# Altium PCB X1.PcbDoc
Units mil, origin at the board's own origin, x right, y up, seen from the top; angles counter-clockwise.
Board outline 2125.98 x 3543.31 mil, 2 copper layers (Top Layer, Bottom Layer); 61 components, 80 nets, 253 pads, 104 vias.
Unrouted connection lines stored in the file: 24.
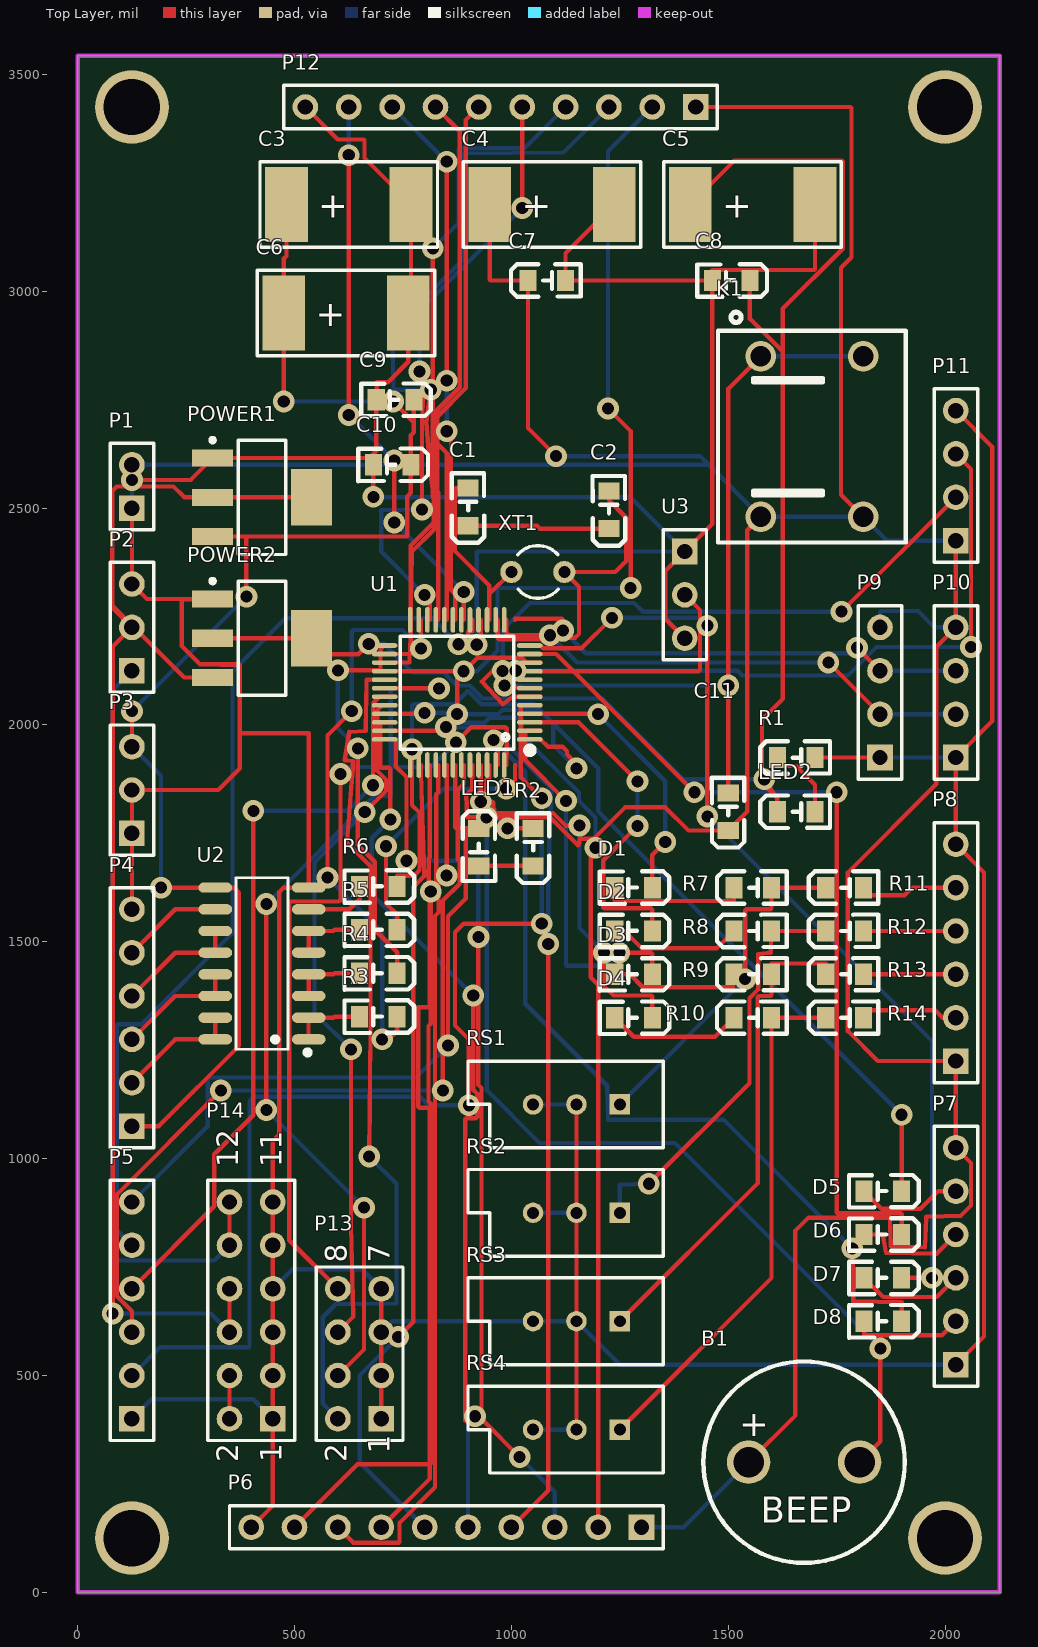
[diagram p0: Top Layer view]
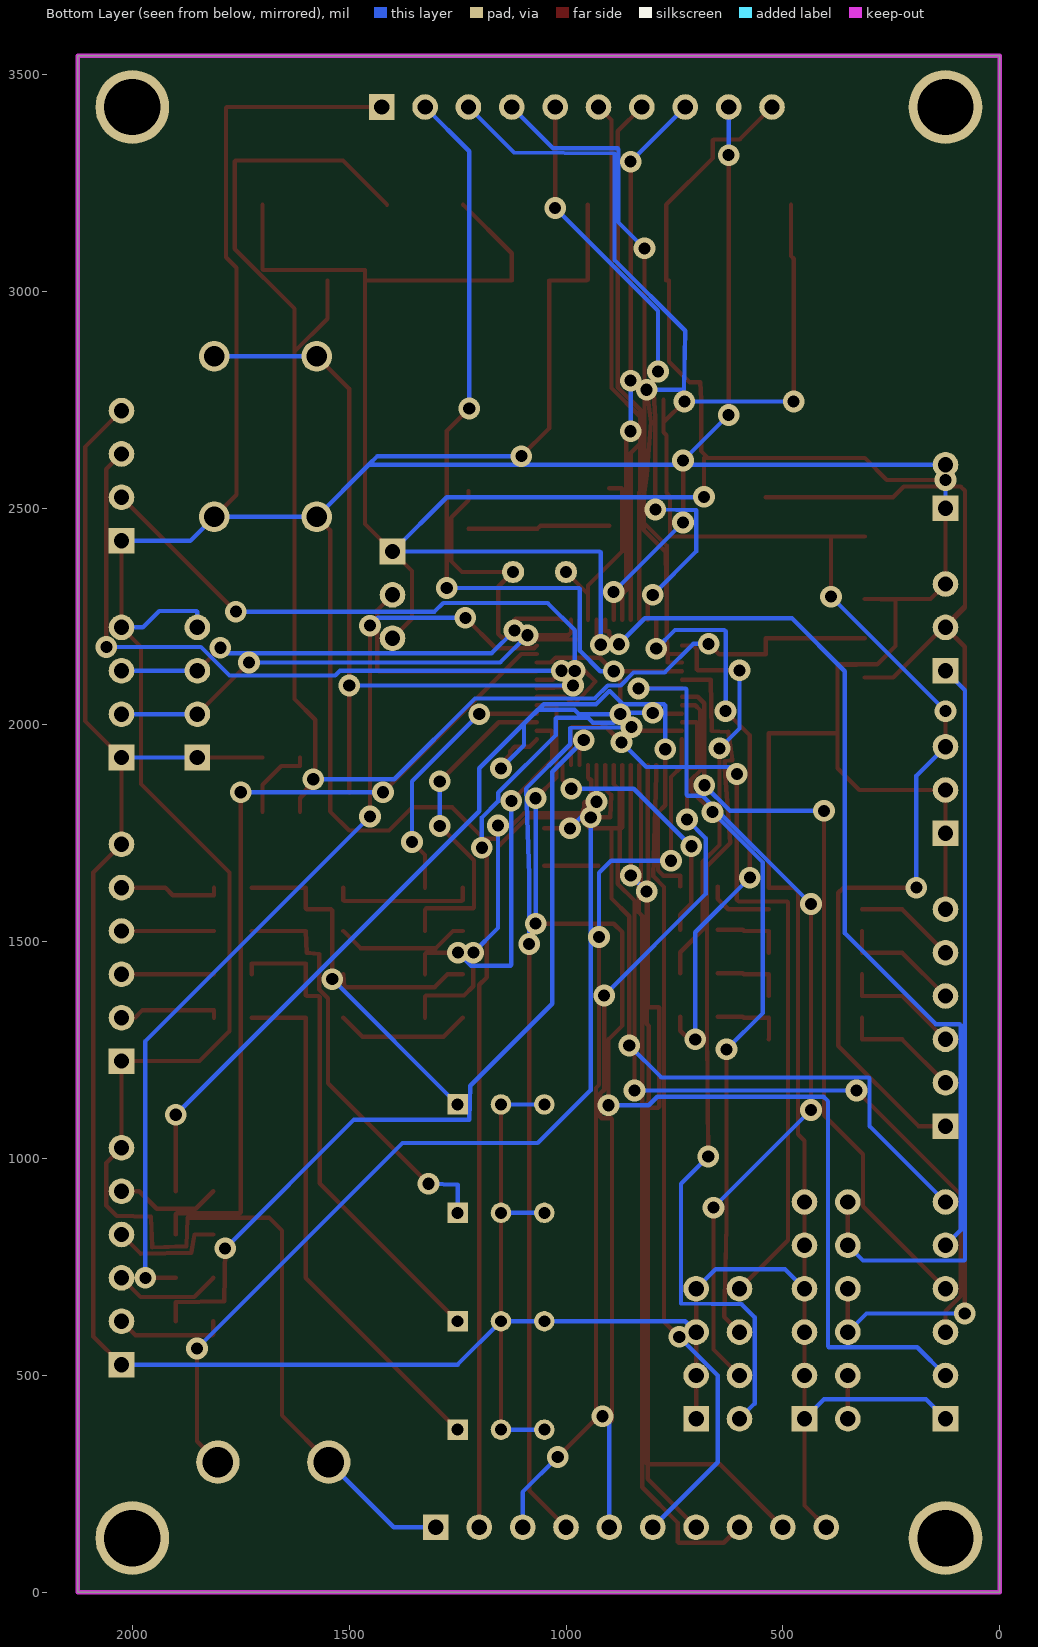
[diagram p1: Bottom Layer view, seen from below]

## Layer stack, top to bottom
Top Solder: solder mask 0.4, Solder Resist, Dk 3.5
Top Layer: signal copper 1.4
Dielectric 1: dielectric 12.6, FR-4, Dk 4.8
Bottom Layer: signal copper 1.4
Bottom Solder: solder mask 0.4, Solder Resist, Dk 3.5

## Board outline
0,0 0,3543.31 2125.98,3543.31 2125.98,0

## Design rules (kind name [scope] priority, off if disabled: settings)
Clearance [InNet('No Net') vs InNet('No Net')] p1: gap=10 ignorepadtopadclearanceinfootprint=TRUE except(0: Arc-Hole Track-Hole SMDPad-Hole THPad-Hole Via-Hole Fill-Hole Poly-Hole Region-Hole Text-Hole; 5: SMDPad-SMDPad THPad-THPad)
PolygonConnect [All] p1: connectstyle=Relief reliefconductorwidth=10 reliefentries=4 polygonreliefangle="90 Angle" airgapwidth=10
RoutingVias [All] p1: holewidth=28 width=50 viastyle="Through Hole" minholewidth=28 minwidth=50 maxholewidth=28 maxwidth=50
SolderMaskExpansion [All] p1: expansion=4 istentingtop=FALSE
Width [All] p1: maxlimit=10 minlimit=1 preferedwidth=10
30 further rules are at their usual default settings.

## Components (designator, comment, footprint, x,y, rotation, side; value= is the part's Value field where it differs from the comment)
B1 "BUZZER" BEEP1 1675,300 r0 top
C1 "Cap" 0805 900,2502.76 r90 top value=30pF
C2 "Cap" 0805 1225,2496.07 r90 top value=30pF
C3 "104" C107V 625,3200 r0 top value=220uf
C4 "104" C107V 1093.7,3200 r0 top value=220uf
C5 "104" C107V 1556.3,3200 r0 top value=220uf
C6 "104" C107V 618.7,2950 r0 top value=220uf
C7 "104" 0805 1081.7,3025 r0 top value=100pF
C8 "104" 0805 1506.69,3025 r180 top value=100pF
C9 "104" 0805 731.69,2750 r180 top value=100pF
C10 "104" 0805 725,2600 r180 top value=100pF
C11 "104" 0805 1500,1800 r90 top value=100pF
D1 "Diode 1N4148" 0805 1281.69,1625 r180 top
D2 "Diode 1N4148" 0805 1281.69,1525 r180 top
D3 "Diode 1N4148" 0805 1281.69,1425 r180 top
D4 "Diode 1N4148" 0805 1281.69,1325 r180 top
D5 "Diode 1N4148" 0805 1856.69,925 r180 top
D6 "Diode 1N4148" 0805 1856.69,825 r180 top
D7 "Diode 1N4148" 0805 1856.69,725 r180 top
D8 "Diode 1N4148" 0805 1856.69,625 r180 top
K1 "KEY_2PIN" KEY-4Pin 1693.11,2664.97 r90 top
LED1 "LED-R(UC)" 0805 925,1718.3 r270 top
LED2 "LED-G(POWER)" 0805 1656.69,1800 r0 top
P1 "MCU 5V IN" HDR1X2 125,2500 r90 top
P2 "5V DCOUT" HDR1X3 125,2125 r90 top
P3 "12V DCIN" HDR1X3 125,1750 r90 top
P4 "2003" HDR1X6 125,1075 r90 top
P5 "GPIO" HDR1X6 125,400 r90 top
P6 "KEY PORT" HDR1X10 1300,150 r180 top
P7 "INT/CCP" HDR1X6 2025,525 r90 top
P8 "ADC" HDR1X6 2025,1225 r90 top
P9 "I2C" HDR1X4 1850,1925 r90 top
P10 "I2C" HDR1X4 2025,1925 r90 top
P11 "UART" HDR1X4 2025,2425 r90 top
P12 "LCD PORT" HDR1X10 1425,3425 r180 top
P13 "SET/GPIO" HDR2X4 700,400 r90 top
P14 "POWER OUT" HDR2X6 450,400 r90 top
POWER1 "LM7805" SOT223_N 425,2525 r0 top
POWER2 "LM1117-3.3" SOT223_N 425,2200 r0 top
R1 "Res2" 0805 1656.69,1925 r0 top value=1K
R2 "Res2" 0805 1050,1718.31 r90 top value=1K
R3 "Res2" 0805 693.31,1327.56 r180 top value=1K
R4 "Res2" 0805 693.31,1427.56 r180 top value=1K
R5 "Res2" 0805 693.31,1527.56 r180 top value=1K
R6 "Res2" 0805 693.31,1627.56 r180 top value=1K
R7 "Res2" 0805 1556.7,1625 r0 top value=10K
R8 "Res2" 0805 1556.7,1525 r0 top value=10K
R9 "Res2" 0805 1556.7,1425 r0 top value=10K
R10 "Res2" 0805 1556.7,1325 r0 top value=10K
R11 "Res2" 0805 1768.31,1625 r0 top value=10K
R12 "Res2" 0805 1768.31,1525 r0 top value=10K
R13 "Res2" 0805 1768.31,1425 r0 top value=10K
R14 "Res2" 0805 1768.31,1325 r0 top value=10K
RS1 "RPot" VR5 1150,1125 r180 top value=10K
RS2 "RPot" VR5 1150,875 r180 top value=10K
RS3 "RPot" VR5 1150,625 r180 top value=10K
RS4 "RPot" VR5 1150,375 r180 top value=10K
U1 "STC12C5A60S2-LQFP48" LQFP-48_7x7x05P 875,2075 r90 top
U2 "ULN2803" SOP-16 425,1450 r90 top
U3 "TOP0038" HDR1X3 1400,2400 r270 top
XT1 "12M" R38 1061.02,2352.76 r90 top

## Footprints (in the part's own frame and the unit in brackets; to place one, negate y for a bottom-side part, rotate by r counter-clockwise, add the part's x,y. Pads: shape width x height; smd on the part's side, far side on the other; paste and mask are expansions set on the pad)
0805 [mm]
  rect 1x1.25 smd: 1(-1.1,0) 2(1.1,0)
  silkscreen extent -2.1,-0.95 1.98,0.96
BEEP1 [mil]
  round 100 hole 70: 1(-127.95,0) 2(127.95,0)
  silkscreen extent -232,-232 232,232
C107V [mm]
  rect 2.5x4.4 smd: 1(-3.65,0) 2(3.65,0)
  silkscreen extent -5.2,-2.5 5.2,2.5
HDR1X2 [mm] "Connector; Header; 2 Position"
  rect 1.5x1.5 hole 0.9: 1(0,0)
  round 1.5 hole 0.9: 2(2.54,0)
  silkscreen extent -1.27,-1.27 3.81,1.27
HDR1X3 [mm] "Connector; Header; 3 Position"
  rect 1.5x1.5 hole 0.9: 1(0,0)
  round 1.5 hole 0.9: 2(2.54,0) 3(5.08,0)
  silkscreen extent -1.27,-1.27 6.35,1.27
HDR1X4 [mm] "Connector; Header; 4 Position"
  rect 1.5x1.5 hole 0.9: 1(0,0)
  round 1.5 hole 0.9: 2(2.54,0) 3(5.08,0) 4(7.62,0)
  silkscreen extent -1.27,-1.27 8.89,1.27
HDR1X6 [mm] "Connector; Header; 6 Position"
  rect 1.5x1.5 hole 0.9: 1(0,0)
  round 1.5 hole 0.9: 2(2.54,0) 3(5.08,0) 4(7.62,0) 5(10.16,0) 6(12.7,0)
  silkscreen extent -1.27,-1.27 13.97,1.27
HDR1X10 [mm] "Connector; Header; 10 Position"
  rect 1.5x1.5 hole 0.9: 1(0,0)
  round 1.5 hole 0.9: 2(2.54,0) 3(5.08,0) 4(7.62,0) 5(10.16,0) 6(12.7,0) 7(15.24,0) 8(17.78,0) 9(20.32,0) 10(22.86,0)
  silkscreen extent -1.27,-1.27 24.13,1.27
HDR2X4 [mm] "Connector; Header; 4x2 Position"
  rect 1.5x1.5 hole 0.9: 1(0,0)
  round 1.5 hole 0.9: 2(0,2.54) 3(2.54,0) 4(2.54,2.54) 5(5.08,0) 6(5.08,2.54) 7(7.62,0) 8(7.62,2.54)
  silkscreen extent -1.27,-1.27 8.89,3.81
HDR2X6 [mm] "Connector; Header; 6x2 Position"
  rect 1.5x1.5 hole 0.9: 1(0,0)
  round 1.5 hole 0.9: 2(0,2.54) 3(2.54,0) 4(2.54,2.54) 5(5.08,0) 6(5.08,2.54) 7(7.62,0) 8(7.62,2.54) 9(10.16,0) 10(10.16,2.54) 11(12.7,0) 12(12.7,2.54)
  silkscreen extent -1.27,-1.27 13.97,3.81
KEY-4Pin [mm]
  round 1.8 hole 1.2: 1(-4.7,-3) 1(-4.7,3) 2(4.7,-3) 2(4.7,3)
  silkscreen extent -6.2,-5.5 7.28,5.5
LQFP-48_7x7x05P [mm]
  oval 0.27x1.5 smd: 1(-2.75,-4.25) 2(-2.25,-4.25) 3(-1.75,-4.25) 4(-1.25,-4.25) 5(-0.75,-4.25) 6(-0.25,-4.25) 7(0.25,-4.25) 8(0.75,-4.25) 9(1.25,-4.25) 10(1.75,-4.25) 11(2.25,-4.25) 12(2.75,-4.25) 25(2.75,4.25) 26(2.25,4.25) 27(1.75,4.25) 28(1.25,4.25) 29(0.75,4.25) 30(0.25,4.25) 31(-0.25,4.25) 32(-0.75,4.25) 33(-1.25,4.25) 34(-1.75,4.25) 35(-2.25,4.25) 36(-2.75,4.25)
  oval 1.5x0.27 smd: 13(4.25,-2.75) 14(4.25,-2.25) 15(4.25,-1.75) 16(4.25,-1.25) 17(4.25,-0.75) 18(4.25,-0.25) 19(4.25,0.25) 20(4.25,0.75) 21(4.25,1.25) 22(4.25,1.75) 23(4.25,2.25) 24(4.25,2.75) 37(-4.25,2.75) 38(-4.25,2.25) 39(-4.25,1.75) 40(-4.25,1.25) 41(-4.25,0.75) 42(-4.25,0.25) 43(-4.25,-0.25) 44(-4.25,-0.75) 45(-4.25,-1.25) 46(-4.25,-1.75) 47(-4.25,-2.25) 48(-4.25,-2.75)
  silkscreen extent -3.59,-4.46 3.3,3.34
R38 [mm] "Crystal, Thru-Hole; 2 Leads; Body 3.1 x 8.2 mm (Dia.xH)"
  round 1.3 hole 0.7: 1(0,1.55) 2(0,-1.55)
  silkscreen extent -1.55,-1.19 1.55,1.17
SOP-16 [mil]
  oval 23.7x77.6 smd: 1(-175,-107.7) 2(-125,-107.7) 3(-75,-107.7) 4(-25,-107.7) 5(25,-107.7) 6(75,-107.7) 7(125,-107.7) 8(175,-107.7) 9(175,107.7) 10(125,107.7) 11(75,107.7) 12(25,107.7) 13(-25,107.7) 14(-75,107.7) 15(-125,107.7) 16(-175,107.7)
  silkscreen extent -211,-111 198,60
SOT223_N [mm] "SOT223, 4-Leads, Body 6.5x3.5mm, Pitch 2.3mm, Lead Span 7mm, IPC Medium Density"
  rect 2.4x1 smd: 1(-2.9,2.3) 2(-2.9,0) 3(-2.9,-2.3)
  rect 2.4x3.3 smd: 4(2.9,0)
  silkscreen extent -3.02,-3.35 1.4,3.47, body extent -1.85,-3.35 1.85,3.35, height 1.7
VR5 [mm] "Thru-Hole; 3 Leads"
  rect 1.2x1.2 hole 0.7: 1(-2.54,0)
  round 1.2 hole 0.7: 2(0,0) 3(2.54,0)
  silkscreen extent -5.08,-2.54 6.35,2.54

## Part data
C1 C2: "Capacitor", LatestRevisionDate=17-Jul-2002, LatestRevisionNote="Re-released for DXP Platform.", PackageDescription="Radial Cap, Thru-Hole; 2 Leads; 0.3 in Pin Spacing", PackageReference=RAD-0.3, Published=8-Jun-2000, Publisher="Altium Limited"
C3 C4 C5 C6: library part Cap2, "Capacitor", PackageDescription="Capacitor; 2 Leads", PackageReference=CAPR5-4X5, Published=23-Sep-2002, Publisher="Altium Limited"
C7 C8 C9 C10 C11: library part Cap, "Capacitor", LatestRevisionDate=17-Jul-2002, LatestRevisionNote="Re-released for DXP Platform.", PackageDescription="Radial Cap, Thru-Hole; 2 Leads; 0.3 in Pin Spacing", PackageReference=RAD-0.3, Published=8-Jun-2000, Publisher="Altium Limited"
D1 D2 D3 D4 D5 D6 D7 D8: "High Conductance Fast Diode", Code_JEDEC=DO-204-AH, ComponentLink1Description="Manufacturer Link", ComponentLink1URL=http://www.fairchildsemi.com/, ComponentLink2Description=Datasheet, ComponentLink2URL=http://www.fairchildsemi.com/ds/1N%2F1N4148.pdf, DatasheetVersion=1997, LatestRevisionDate=17-Jul-2002, LatestRevisionNote="Re-released for DXP Platform.", PackageDescription="Diode, Axial; Body 3.8 x 1.9 mm (LxDia. max), Lead Dia. 0.53 mm (max)", PackageReference=DO-35, Published=8-Jun-2000, Publisher="Altium Limited"
LED1 LED2: library part LED2, "Typical RED, GREEN, YELLOW, AMBER GaAs LED", LatestRevisionDate=17-Jul-2002, LatestRevisionNote="Re-released for DXP Platform.", PackageDescription="SM LED; 2 Flat Leads", PackageReference=3.2X1.6X1.1, PackageVersion=Feb-2002, Published=8-Jun-2000, Publisher="Altium Limited"
P1: library part "Header 2", "Header, 2-Pin", LatestRevisionDate=17-Jul-2002, LatestRevisionNote="Re-released for DXP Platform.", Publisher="Altium Limited"
P2 P3 U3: library part "Header 3", "Header, 3-Pin", LatestRevisionDate=17-Jul-2002, LatestRevisionNote="Re-released for DXP Platform.", Publisher="Altium Limited"
P4 P5 P7 P8: library part "Header 6", "Header, 6-Pin", LatestRevisionDate=17-Jul-2002, LatestRevisionNote="Re-released for DXP Platform.", Publisher="Altium Limited"
P6 P12: library part "Header 10", "Header, 10-Pin", LatestRevisionDate=17-Jul-2002, LatestRevisionNote="Re-released for DXP Platform.", Publisher="Altium Limited"
P9 P10 P11: library part "Header 4", "Header, 4-Pin", LatestRevisionDate=17-Jul-2002, LatestRevisionNote="Re-released for DXP Platform.", Publisher="Altium Limited"
P13: library part "Header 4X2", "Header, 4-Pin, Dual row", LatestRevisionDate=17-Jul-2002, LatestRevisionNote="Re-released for DXP Platform.", Publisher="Altium Limited"
P14: library part "Header 6X2", "Header, 6-Pin, Dual row", LatestRevisionDate=17-Jul-2002, LatestRevisionNote="Re-released for DXP Platform.", Publisher="Altium Limited"
POWER2: library part LM7805
R1 R2 R3 R4 R5 R6 R7 R8 R9 R10 R11 R12 R13 R14: "Resistor", LatestRevisionDate=17-Jul-2002, LatestRevisionNote="Re-released for DXP Platform.", PackageDescription="Axial Device, Thru-Hole; 2 Leads; 0.4 in Pin Spacing", PackageReference=AXIAL-0.4, Published=8-Jun-2000, Publisher="Altium Limited"
RS1 RS2 RS3 RS4: "Potentiometer", LatestRevisionDate=17-Jul-2002, LatestRevisionNote="Re-released for DXP Platform.", PackageDescription="Variable Resistor, Thru-Hole; 3 Leads", PackageReference=VR5, Published=8-Jun-2000, Publisher="Altium Limited", Set Position=0.5, Sim Note="Enter the Resistance value and the set point into parameter fields."
U2: library part ULN2003
XT1: library part XTAL, "Crystal Oscillator", LatestRevisionDate=17-Jul-2002, LatestRevisionNote="Re-released for DXP Platform.", PackageDescription="Crystal, Thru-Hole; 2 Leads; Body 3.1 x 8.2 mm (Dia.xH)", PackageReference=R38, Published=8-Jun-2000, Publisher="Altium Limited"

## Free pads (board coordinates)
  round 170 hole 130: 0(125,125) 0(125,3425) 0(2000,125) 0(2000,3425)

## Via types
v1: diameter 50, hole 28, Top Layer to Bottom Layer, 104 vias

## Nets (pads, with @x,y where several pads share a name; then routed paths per layer and width w, separated by ;. In a path a pad name is that pad's centre, name@x,y a point inside that pad or via, vN(x,y) a via of type N, cw(c..) or ccw(c..) an arc to the next point about the centre after c; other vN are vias at no path point)
00: P6.9 U1.40 | length 2005
  Top Layer w10: P6.9 645,295 812,295 814,297 814,1127 809,1132 809,1306 814,1311 v1(814,1616) ; v1(850.79,1652.79) 850.79,1907.68
  Bottom Layer w10: v1(814,1616) v1(850.79,1652.79)
01: P6.8 U1.39 | length 1991.1
  Top Layer w10: P6.8 636,114 740,114 742,116 742,160 824,242 824,1559.64 832,1567.64 832,1636 830,1638 829,1638 827,1640 827,1840.21 831.1,1844.31 831.1,1907.68
02: P6.7 U1.38 | length 1852.1
  Top Layer w10: P6.7 811.42,261.42 811.42,1114 808.42,1117 788,1117 785,1120 785,1347.97 786,1348.97 808.39,1348.97 811.42,1352 811.42,1612.79 809.79,1614.42 809.79,1692.79 811.42,1694.42 811.42,1907.68
03: P6.6 U1.37 | length 1881.6
  Top Layer w10: v1(739,589) 774,624 774,1626.55 799,1651.55 791.73,1887.27 791.73,1907.68
  Bottom Layer w10: v1(739,589) 650,500 650,300 P6.6
3.3V: C5.1 C8.1 LED2.1 POWER2.2 POWER2.4 | length 3683.4
  Top Layer w10: POWER2.2 POWER2.4 539.17,2163 647,2163 v1(671,2187) ; C5.1 1514.21,3301.62 1762,3301.62 1764.21,3299.4 1764.21,3098.38 1626,2960.17 1626,2861 ; C8.1 1550,2937 1626,2861 ; v1(1583,1875) 1613.39,1830.61 ; LED2.1 1613.39,1830.61 ; 1613.39,1830.61 1578,1866 1578,1875 1578,2012 1626,2060 1626,2861
  Bottom Layer w10: v1(671,2187) 706.62,2187 772.62,2121 844.18,2121 874,2091.18 903.82,2091.18 934,2061 1210,2061 1396,1875 v1(1583,1875)
04: P6.5 U1.36 | length 2000.9
  Top Layer w10: U1.36@732.68,1966.73 733,1966.73 733,1905 758,1880 v1(758,1687) ; v1(916,406) 931,421 931,1163 924,1170 v1(924,1511)
  Bottom Layer w10: v1(758,1687) 896,1687 924,1659 v1(924,1511) ; P6.5 900,404 902,406 v1(916,406)
05: P6.4 U1.35 | length 2181.5
  Top Layer w10: U1.35@732.68,1986.42 840.42,1986.42 v1(849,1995) ; P6.4 1085,235 v1(1085,1495)
  Bottom Layer w10: v1(849,1995) 990,1993 990,1955.32 1092,1853.32 1085,1652.18 v1(1085,1495)
5V: B1.1 C4.1 C7.1 C11.1 K1.1 LED1.1 P1.2 P5.6 P6.1 P7.6 P8.1 P9.4 P10.4 P11.1 P12.1 U1.41 | length 10986.4
  Top Layer w10: v1(854,1261) 854,1559 895,1600 895,1758.61 898,1761.61 ; 870.47,1907.68 870.47,1764 872.85,1761.61 898,1761.61 ; C4.1 950,3027 952,3025 C7.1 1038.39,2684.61 v1(1103,2620) ; P12.1 1782,3425 1784.21,3422.79 1784.21,3078.38 1760,3054.17 1760,2531.15 K1.1@1811.23,2479.92 ; B1.1 1655,407.95 1655,834 1685,864 1873,864 1875,798 1954,795 1957,866 2036,868 2060,892 2060,990 P7.6 P8.1 1845,1225 1776,1294 1776,1660 1980,1864 1980,2180 P10.4 P11.1 ; K1.1@1575,2479.92 1544,2448.92 1544,1800.69 C11.1 1408.31,1756.69 1355,1810 1262.27,1810 1190.27,1738 1159,1738 1157,1736 1157,1726 1154,1723 1153,1723 1089,1787 970.39,1787 945,1761.61 LED1.1 898,1761.61
  Bottom Layer w10: P5.6 300,1075 300,1185 302,1187 780,1187 v1(854,1261) ; P1.2 1454.92,2600 ; v1(1103,2620) 1434.92,2620 1454.92,2600 ; P6.1 1397.05,150 B1.1 ; P9.4 1850,2261 1852,2263 1938,2263 1976,2225 P10.4 ; P11.1 1866.15,2425 1811.23,2479.92 1575,2479.92 1454.92,2600
5VOUT: P2.2 P14.6 P14.8 POWER1.2 POWER1.4 POWER2.3 | length 3094.5
  Top Layer w10: v1(80.47,643) 80.47,2180.47 P2.2 80,2270 80,2275 ; POWER2.3 245.55,2109.45 80,2275 ; P14.6 P14.8 ; POWER1.4 POWER1.2 246,2525 221,2550 90,2550 80,2540 80,2275
  Bottom Layer w10: v1(80.47,643) 307,643 P14.6
06: P6.3 U1.34 | length 2161.4
  Top Layer w10: v1(721,1781.93) 721,1898 718,1901 700,1901 698,1903 698,2004.1 700,2006.1 U1.34@732.68,2006.1 ; v1(912,1376.14) 912,1159 921,1150 921,1096 918,1093 896,1093 894,1091 894,396.21 896,394.21 936.79,394.21 v1(1019,312)
  Bottom Layer w10: v1(721,1781.93) 678,1738.93 678,1610.14 v1(912,1376.14) ; v1(1019,312) 1100,231 P6.3
07: P6.2 U1.33 | length 2254.6
  Top Layer w10: U1.33@732.68,2025.79 797.79,2025.79 v1(800,2028) ; v1(1194,1717) 1183,1706 1183,1418 1200,1401 P6.2
  Bottom Layer w10: v1(800,2028) 867,2028 890,2005 938,2005 950,2017 1022,2017 1024,2015 1024,1976 1156,1844 1156,1824.46 1194,1786.46 v1(1194,1717)
10: B1.2 U1.43 | length 2237.2
  Top Layer w10: 909.84,1907.68 909.84,1852.6 896,1838.76 898,1787 v1(943,1787) ; B1.2 1851,348.05 v1(1851,562)
  Bottom Layer w10: v1(943,1787) 943,1158 1065,1036 1377,1036 v1(1851,562)
11: R2.2 U1.44 | length 230.6
  Top Layer w10: v1(929.53,1823) 929.53,1907.68 ; v1(990.91,1761.61) R2.2
  Bottom Layer w10: v1(929.53,1823) v1(990.91,1761.61)
12: D4.1 U1.45 | length 899.1
  Top Layer w10: 949.21,1907.68 949.21,1878 946.21,1875 944,1875 942,1873 942,1827 944,1825 948,1825 950,1823 956,1823 958,1821 958,1807 960,1805 960.44,1805 960.94,1804.5 960.94,1800 963.94,1797 1096,1797 1125,1768 v1(1157,1768) ; v1(1213.7,1475) 1213.7,1397.69 1235.39,1376 1323,1376 1325,1374 D4.1
  Bottom Layer w10: v1(1157,1768) 1157,1531.7 v1(1213.7,1475)
12VIN: C3.1 C6.1 C9.1 C10.1 P3.3 P4.1 POWER1.3 U2.9 | length 3355.4
  Top Layer w10: P4.1 187,1075 372,1260 372,1613 360,1625 U2.9 v1(192,1625) ; P3.3 v1(125,2032) ; POWER1.3 386.55,2434.45 ; v1(389,2296) 389,2432 386.55,2434.45 ; v1(475,2746) C6.1 475,3075 481.3,3081.3 C3.1 ; v1(727,2746) 775,2698 ; C9.1 775,2698 ; 386.55,2434.45 758,2434.45 760,2436.45 760,2527 768.31,2535.31 C10.1 768.31,2668.31 775,2675 775,2698
  Bottom Layer w10: P3.3 192,1883 v1(192,1625) ; v1(125,2032) v1(389,2296) ; v1(475,2746) v1(727,2746)
12VOUT: P2.1 P14.10 P14.12 | length 1762
  Top Layer w10: P14.10 P14.12
  Bottom Layer w10: P2.1 80,2080 80,767 82,765 315,765 P14.10
13: D8.1 U1.46 | length 2009
  Top Layer w10: v1(959,1965) 968.9,1955.1 968.9,1907.68 ; v1(1786,793) 1788,671 1900,669 D8.1
  Bottom Layer w10: v1(959,1965) 1031.83,1892.17 1031.83,1357.17 1221,1168 1223,1090 1489,1090 v1(1786,793)
14: P13.8 U1.47 | length 1861.4
  Top Layer w10: P13.8 488,812 488,1591 490,1593 602,1593 606,1597 v1(606,1887) ; v1(872,1960) 907,1995 986,1995 989,1992 989,1932.42 988.58,1932 988.58,1907.68
  Bottom Layer w10: v1(606,1887) 622,1903 815,1903 v1(872,1960)
15: D3.1 U1.2 | length 873
  Top Layer w10: U1.2@1067.32,1986.42 1034,1986.42 1032,1984.42 1032,1919 v1(1126,1825) ; v1(1249,1475) 1322,1475 1325,1472 D3.1
  Bottom Layer w10: v1(1126,1825) 1126,1447 1128,1445 1219,1445 v1(1249,1475)
16: D2.1 U1.3 | length 767.8
  Top Layer w10: U1.3@1067.32,2006.1 1154.9,2006.1 v1(1291,1870) ; v1(1291,1767) 1212,1688 1212,1579 1214,1577 1322,1577 1325,1574 D2.1
  Bottom Layer w10: v1(1291,1767) v1(1291,1870)
17: D1.1 U1.4 | length 609.6
  Top Layer w10: U1.4@1067.32,2025.79 1199.21,2025.79 v1(1200,2025) ; D1.1 1325,1700 v1(1355,1730)
  Bottom Layer w10: v1(1200,2025) 1355,1870 v1(1355,1730)
20: P12.9 U1.19 | length 1292.5
  Top Layer w10: v1(625,2715) v1(625,3314) ; v1(730,2467) v1(730,2610) ; 890.16,2242.32 v1(890.16,2306.84)
  Bottom Layer w10: v1(625,2715) v1(730,2610) ; v1(625,3314) P12.9 ; v1(730,2467) v1(890.16,2306.84)
21: P12.8 U1.20 | length 1242.9
  Top Layer w10: v1(851,2677.37) 860.79,2667.58 860.79,2311 870.47,2301.32 870.47,2242.32 ; v1(851,2794) v1(851,3299)
  Bottom Layer w10: P12.8 v1(851,3299) ; v1(851,2677.37) v1(851,2794)
22: P12.7 U1.21 | length 1236.4
  Top Layer w10: P12.7 881,3369 881,2779 829,2727 829,2648.79 850.79,2627 850.79,2242.32
23: P12.6 U1.22 | length 1223.3
  Top Layer w10: 831.1,2242.32 831.1,2536 829,2538.1 829,2711 895,2777 895,3395 P12.6
24: P12.5 U1.23 | length 1424.2
  Top Layer w10: v1(788,2815) 800,2803 794,2707.87 v1(794,2497) ; v1(800,2300) 811.42,2288.58 811.42,2242.32 ; v1(1025,3192) P12.5
  Bottom Layer w10: v1(788,2815) 788,2955 v1(1025,3192) ; v1(794,2497) 700,2495 700,2400 v1(800,2300)
25: P12.4 U1.26 | length 1532.4
  Top Layer w10: U1.26@732.68,2163.58 766,2163.58 768,2165.58 768,2414 821,2467 821,2524 819,2526 v1(819,3099)
  Bottom Layer w10: v1(819,3099) 879,3159 879,3328 881,3330 1030,3330 P12.4
26: P12.3 U1.27 | length 1763.3
  Top Layer w10: U1.27@732.68,2143.9 765.11,2143.9 767.21,2206 770,2399 821,2450 821,2528 814,2576.5 804,2699 v1(814,2773)
  Bottom Layer w10: v1(814,2773) 728,2773 725,2909 888,3072 888,3318 1120,3320 P12.3
27: P12.2 U1.28 | length 1878.5
  Top Layer w10: U1.28@732.68,2124.21 889.79,2124.21 v1(890,2124) ; v1(1223,2730) 1275,2678 v1(1275,2316)
  Bottom Layer w10: v1(890,2124) 921,2124 968,2171 968,2314 970,2316 v1(1275,2316) ; v1(1223,2730) 1223,3323 P12.2
30: P11.2 U1.6 | length 1504.3
  Top Layer w10: v1(979.79,2124.79) 956.58,2124.79 932,2100.21 980.21,2048 1003.8,2065.16 U1.6@1067.32,2065.16 ; v1(1761.39,2261.39) P11.2
  Bottom Layer w10: v1(979.79,2124.79) 979.79,2218.79 1042.39,2281.39 1283.07,2281.39 1303.07,2261.39 v1(1761.39,2261.39)
31: P11.3 U1.8 | length 1607.2
  Top Layer w10: v1(1010,2125) 1030.47,2104.53 U1.8@1067.32,2104.53 ; P11.3 2060,2590 v1(2060,2180)
  Bottom Layer w10: v1(1010,2125) 1521.3,2125 1532.3,2114 1776,2114 1842,2180 v1(2060,2180)
32: U1.9 U3.2 | length 556.2
  Top Layer w10: U1.9@1067.32,2124.21 1432,2124.21 1435,2127.21 1435,2265 U3.2
33: D5.1 U1.10 | length 1949.4
  Top Layer w10: v1(875,2025) 875,2108 922,2155 1023.9,2155 1035,2143.9 U1.10@1067.32,2143.9 ; D5.1 v1(1900,1101.14)
  Bottom Layer w10: v1(875,2025) 970.41,2025 980.41,2035 1065,2035 1200,1900 1200,1801.14 v1(1900,1101.14)
33V: P14.2 P14.4 | length 100
  Top Layer w10: P14.2 P14.4
34: D6.1 U1.11 | length 1982.3
  Top Layer w10: U1.11@1067.32,2163.58 1103.42,2163.58 v1(1422,1845) ; v1(1750,1845) 1750,876 1752,874 1898,874 1900,872 D6.1
  Bottom Layer w10: v1(1422,1845) v1(1750,1845)
35: D7.1 U1.12 | length 2212.3
  Top Layer w10: U1.12@1067.32,2183.27 1073.59,2177 1162,2177 v1(1232,2247) ; v1(1452,1789) v1(1452,2229) ; D7.1 v1(1970,725)
  Bottom Layer w10: v1(1232,2247) 1434,2247 v1(1452,2229) ; v1(1452,1789) 1970,1271 v1(1970,725)
36: P9.3 P10.3 U1.13 | length 1093.5
  Top Layer w10: 1008.27,2242.32 1008.27,2245 1116,2245 1119,2242 v1(1119,2218) ; v1(1797,2178) P9.3
  Bottom Layer w10: v1(1119,2218) 1171.53,2165.47 1784.47,2165.47 v1(1797,2178) ; P9.3 P10.3
37: P9.2 P10.2 U1.14 | length 1143.6
  Top Layer w10: 988.58,2242.32 988.58,2213 994.58,2207 v1(1089,2207) ; v1(1731,2144) P9.2
  Bottom Layer w10: v1(1089,2207) 1152,2144 v1(1731,2144) ; P9.2 P10.2
40: P5.5 U1.18 | length 2152.5
  Top Layer w10: v1(878.2,2186) 900,2207.8 900,2215 901,2216 909.84,2216 909.84,2242.32
  Bottom Layer w10: P5.5 90,835 90,1308 92,1310 147,1310 357,1520 357,2124 479,2246 818.2,2246 v1(878.2,2186)
41: P5.4 U1.31 | length 1765.5
  Top Layer w10: P5.4 315,890 315,1010 405,1100 v1(405,1802) ; v1(681,1861) 681,2050.16 696,2065.16 U1.31@732.68,2065.16
  Bottom Layer w10: v1(405,1802) 622,1802 v1(681,1861)
42: P5.3 U1.42 | length 1957.3
  Top Layer w10: P5.3 125,648 90.47,682.53 90.47,917.47 v1(330,1157) ; v1(842,1157) 842,1595 881,1634 881,1685 876,1690 876,1849.84 890.16,1864 890.16,1907.68
  Bottom Layer w10: v1(330,1157) v1(842,1157)
43: P5.2 U1.5 | length 2570.7
  Top Layer w10: v1(902,1123) 902,1275 870,1307 870,1522 889.86,1541.86 v1(1070,1541.86) ; U1.5@1067.32,2045.47 1024,2045.47 1022,2043.47 1022,1879 v1(1070,1831)
  Bottom Layer w10: P5.2 190,565 394,565 396,567 396,1132.61 406,1142.61 789.39,1142.61 809,1123 v1(902,1123) ; v1(1070,1541.86) v1(1070,1831)
44: P13.2 U1.29 | length 2038.1
  Top Layer w10: v1(672,1005) 675,1298 675,1674.41 621,1728.41 634,1901 634,1917 616,1919 626,1984 664,1986 666,2104.53 U1.29@732.68,2104.53
  Bottom Layer w10: P13.2 565,435 565,634 595,664 735,666 735,942 v1(672,1005)
45: P13.4 U1.30 | length 2051.9
  Top Layer w10: v1(435,1112) v1(435,1587) ; P13.4 660,560 v1(660,887) ; U1.30@732.68,2084.84 832.16,2084.84 v1(833,2084)
  Bottom Layer w10: v1(435,1112) v1(660,887) ; v1(435,1587) 685,1837 720,1837 722,1839 722,2082 724,2084 v1(833,2084)
46: P13.6 U1.32 | length 1606.7
  Top Layer w10: P13.6 635,635 630,847 v1(630,1252) ; v1(662,1799) 711,1848 711,1874 691,1894 691,2034.47 702,2045.47 U1.32@732.68,2045.47
  Bottom Layer w10: v1(630,1252) 546,1336 546,1683 v1(662,1799)
50: R3.1 U1.24 | length 1337
  Top Layer w10: v1(576,1648) 576,1976 v1(632,2032) ; v1(702,1275) 716.62,1275 736.62,1295 R3.1 ; v1(791.73,2176) 791.73,2242.32
  Bottom Layer w10: v1(576,1648) 702,1522 v1(702,1275) ; v1(632,2032) 632,2216 635,2219 748.73,2219 v1(791.73,2176)
51: R4.1 U1.25 | length 938.4
  Top Layer w10: v1(600,2126) 696.16,2126 698.16,2128 698.16,2174 707.43,2183.27 U1.25@732.68,2183.27 ; v1(646,1946) 646,1723.41 685,1684.41 685,1527.62 736.62,1476 R4.1
  Bottom Layer w10: v1(600,2126) 600,1992 v1(646,1946)
52: R5.1 U1.48 | length 598.5
  Top Layer w10: v1(711,1720.41) 711,1588 736.62,1562.38 R5.1 ; v1(988,1853) 1008.27,1873.27 1008.27,1907.68
  Bottom Layer w10: v1(711,1720.41) 843.59,1853 v1(988,1853)
53: R6.1 U1.1 | length 1084.6
  Top Layer w10: R6.1 736.62,1652.5 775.5,1652.5 788,1665 788,1798 771,1815 v1(771,1944) ; U1.1@1067.32,1966.73 1084.36,1949.69 1118.12,1949.69 1128.2,1939.61 1128.2,1932.62 1150,1910.82 v1(1150,1900)
  Bottom Layer w10: v1(771,1944) 771,2045 774,2048 868.63,2048 898.63,2078 901,2078 931,2048 1051.37,2048 1096.86,2002.51 1096.86,1953.14 v1(1150,1900)
2003IN1: R3.2 U2.1 U2.2 | length 169.8
  Top Layer w10: U2.1 532,1275 532,1325 U2.2 590,1325 592.56,1327.56 R3.2
2003IN2: R4.2 U2.3 U2.4 | length 168.4
  Top Layer w10: U2.3 U2.4 590,1425 592.56,1427.56 R4.2
2003IN3: R5.2 U2.5 U2.6 | length 168.4
  Top Layer w10: U2.5 U2.6 590,1525 592.56,1527.56 R5.2
2003IN4: R6.2 U2.7 | length 155.8
  Top Layer w10: U2.7 626,1575 650,1599 R6.2
2003OUT1: P4.2 U2.15 U2.16 | length 283.7
  Top Layer w10: P4.2 225,1275 U2.16 U2.15
2003OUT2: P4.3 U2.13 U2.14 | length 283.7
  Top Layer w10: P4.3 225,1375 U2.14 U2.13
2003OUT3: P4.4 U2.11 U2.12 | length 283.7
  Top Layer w10: P4.4 225,1475 U2.12 U2.11
2003OUT4: P4.5 U2.10 | length 233.7
  Top Layer w10: P4.5 225,1575 U2.10
ADCIN1: P8.5 R11.2 | length 238.2
  Top Layer w10: R11.2 1811.61,1607.46 1906.68,1607.46 1924.22,1625 P8.5
ADCIN2: P8.4 R12.2 | length 213.4
  Top Layer w10: R12.2 P8.4
ADCIN3: P8.3 R13.2 | length 213.4
  Top Layer w10: R13.2 P8.3
ADCIN4: P8.2 R14.2 | length 238.2
  Top Layer w10: R14.2 1811.61,1342.54 1976.63,1342.54 1994.17,1325 P8.2
CCP1: D8.2 P7.2 | length 255.7
  Top Layer w10: D8.2 1813.39,595.39 1816,592.77 1992.77,592.77 P7.2
GND: C3.2 C4.2 C5.2 C6.2 C7.2 C8.2 C9.2 C10.2 P1.1 P2.3 P3.1 P3.2 P4.6 P5.1 P6.10 P7.1 P8.6 P9.1 P10.1 P11.4 P12.10 P13.1 P13.3 P13.5 P13.7 P14.1 P14.3 P14.5 P14.7 P14.9 P14.11 POWER1.1 POWER2.1 R1.2 RS1.2 RS1.3 RS2.2 RS2.3 RS3.2 RS3.3 RS4.2 RS4.3 U1.17 U2.8 U3.1 U3.3 | length 14804.7
  Top Layer w10: P4.6 P3.1 P3.2 324,1850 374,1900 374,1981.3 ; P1.1 P2.3 159.45,2290.55 242,2290.55 ; v1(125,2565) 260.27,2565 POWER1.1 C10.2@672.29,2615.55 ; P6.10 450,200 P14.1 P14.3 P14.5 P14.7 P14.9 P14.11 450,1041 465,1056 465,1615 475,1625 U2.8 532.7,1981.3 374,1981.3 ; P12.10 599.73,3350.27 659,3350.27 661.27,3348 661.27,3307.43 C3.2 768.7,3025 762.4,3025 C6.2 762.4,2837.71 714.69,2790 690.39,2790 C9.2 688.39,2631.65 C10.2@672.29,2615.55 ; v1(681.7,2526) C10.2 681.7,2615.55 C10.2@672.29,2615.55 ; P13.1 P13.3 P13.5 P13.7 ; v1(920,2185) 929.53,2194.53 929.53,2242.32 ; RS4.2 RS3.2 RS2.2 RS1.2 ; C4.2 1125,3087.6 C7.2 C8.2 ; U3.3 1355,2245 1355,2355 U3.1 1463.39,2463.39 C8.2 ; R1.2 P9.1 ; C5.2 1700,3051 1698,3049 1463.39,3049 C8.2 ; P7.1 2090,590 2090,1660 P8.6 P10.1 2109,2009 2109,2641 P11.4 ; 240,2288.55 240,2182 282,2140 ; 240,2288.55 POWER2.1 242,2290.55 ; 240,2288.55 242,2290.55 ; 282,2140 374,2138 ; 282,2140 372,2140 374,2138 ; 374,1981.3 374,2138
  Bottom Layer w10: P5.1 170,445 405,445 P14.1 ; P1.1 v1(125,2565) ; P14.7 495,745 655,745 P13.7 ; v1(681.7,2526) 682.7,2525 1275,2525 U3.1 922,2400 920,2398 v1(920,2185) ; P13.5 725,625 RS3.3 RS3.2 1250,525 P7.1 ; RS4.3 RS4.2 ; RS2.3 RS2.2 ; RS1.3 RS1.2 ; P9.1 P10.1
INTIN1: D5.2 P7.5 | length 245.1
  Top Layer w10: D5.2 1853.78,884.61 1943.61,884.61 1984,925 P7.5
INTIN2: D6.2 P7.4 | length 265
  Top Layer w10: D6.2 1856.43,825 1864,783 1981,781 P7.4
INTIN3: D7.2 P7.3 | length 248.1
  Top Layer w10: D7.2 1857.39,681 1981,681 P7.3
NetC1_1: C1.1 C2.1 | length 327.8
  Top Layer w10: C1.1 1059,2459.45 1065.69,2452.76 C2.1
NetD1_2: D1.2 R7.1 | length 334.7
  Top Layer w10: D1.2 1238.39,1596 1240.39,1594 1511.39,1594 1513.39,1596 R7.1
NetD2_2: D2.2 R8.1 | length 307.7
  Top Layer w10: D2.2 1260.49,1525 1299.98,1485.51 1473.9,1485.51 R8.1
NetD3_2: D3.2 R9.1 | length 314.4
  Top Layer w10: D3.2 1273.31,1425 1302.92,1395.39 1510.78,1395.39 R9.1
NetD4_2: D4.2 R10.1 | length 311.5
  Top Layer w10: D4.2 1282.39,1281 1469.39,1281 R10.1
NetLED1_2: LED1.2 R2.1 | length 125
  Top Layer w10: LED1.2 R2.1
NetLED2_2: LED2.2 R1.1 | length 186.2
  Top Layer w10: R1.1 1613.39,1905.39 1656.61,1905.39 1700,1862 LED2.2
NetR7_2: R7.2 R11.1 RS1.1 | length 802.8
  Top Layer w10: v1(1539,1414) 1539,1572 1542,1575 1598,1575 1600,1577 R7.2 R11.1
  Bottom Layer w10: RS1.1 v1(1539,1414)
NetR8_2: R8.2 R12.1 RS2.1 | length 970.6
  Top Layer w10: v1(1317,942) 1549,1174 1549,1370 1569,1390 1569,1472 1598,1475 R8.2 R12.1
  Bottom Layer w10: RS2.1 1250,940 v1(1317,942)
NetR9_2: R9.2 R13.1 RS3.1 | length 1136.5
  Top Layer w10: RS3.1 1567.87,942.87 1567.87,1372.87 1570,1375 1598,1375 1600,1377 R9.2 1600,1450.08 1725,1450.08 R13.1
NetR10_2: R10.2 R14.1 RS4.1 | length 1220
  Top Layer w10: RS4.1 1600,725 R10.2 R14.1
RST: C11.2 K1.2 U1.7 | length 1877.5
  Top Layer w10: v1(984,2091) 984,2086.84 U1.7@1067.32,2084.84 ; C11.2 v1(1500,2091) 1500,2775 K1.2@1575,2850
  Bottom Layer w10: v1(984,2091) v1(1500,2091) ; K1.2@1575,2850 K1.2@1811.23,2850
XT1: C1.2 U1.16 XT1.1 | length 437.2
  Top Layer w10: C1.2 872,2546.06 870,2544.06 870,2401 949.21,2321.79 949.21,2301.97 ; 949.21,2242.32 949.21,2301.97 ; XT1.1 949.21,2301.97
XT2: C2.2 U1.15 XT1.2 | length 724.2
  Top Layer w10: 968.9,2242.32 968.9,2200 971.9,2197 1126,2197 1130,2201 1147,2201 1156,2210 1156,2318.8 XT1.2 1239.76,2352.76 1265,2378 1265,2478 1225,2518 C2.2

## Keep-outs
Keep-Out Layer:
  the board outline again, w10

## Text inside footprints (layer, text, board x,y; h text height)
B1: Top Overlay "BEEP" at 1575,160 h60; Top Overlay "+" at 1525,360 h60
C3: Top Overlay "+" at 555,3170 h60
C4: Top Overlay "+" at 1023.7,3170 h60
C5: Top Overlay "+" at 1486.3,3170 h60
C6: Top Overlay "+" at 548.7,2920 h60
P13: Top Overlay "2" at 620,300 h50 r90; Top Overlay "1" at 720,320 h50 r90; Top Overlay "7" at 720,760 h50 r90; Top Overlay "8" at 620,760 h50 r90
P14: Top Overlay "12" at 370,980 h50 r90; Top Overlay "1" at 470,1020 h50 r90; Top Overlay "1" at 470,980 h50 r90; Top Overlay "1" at 470,300 h50 r90; Top Overlay "2" at 370,300 h50 r90